# Altium PCB 万年历PCB.PcbDoc
Units mm, origin at the board's own origin, x right, y up, seen from the top; angles counter-clockwise.
Board outline 100 x 100 mm, 2 copper layers (Top Layer, Bottom Layer); 56 components, 53 nets, 233 pads, 1 vias.
Unrouted connection lines stored in the file: 119.
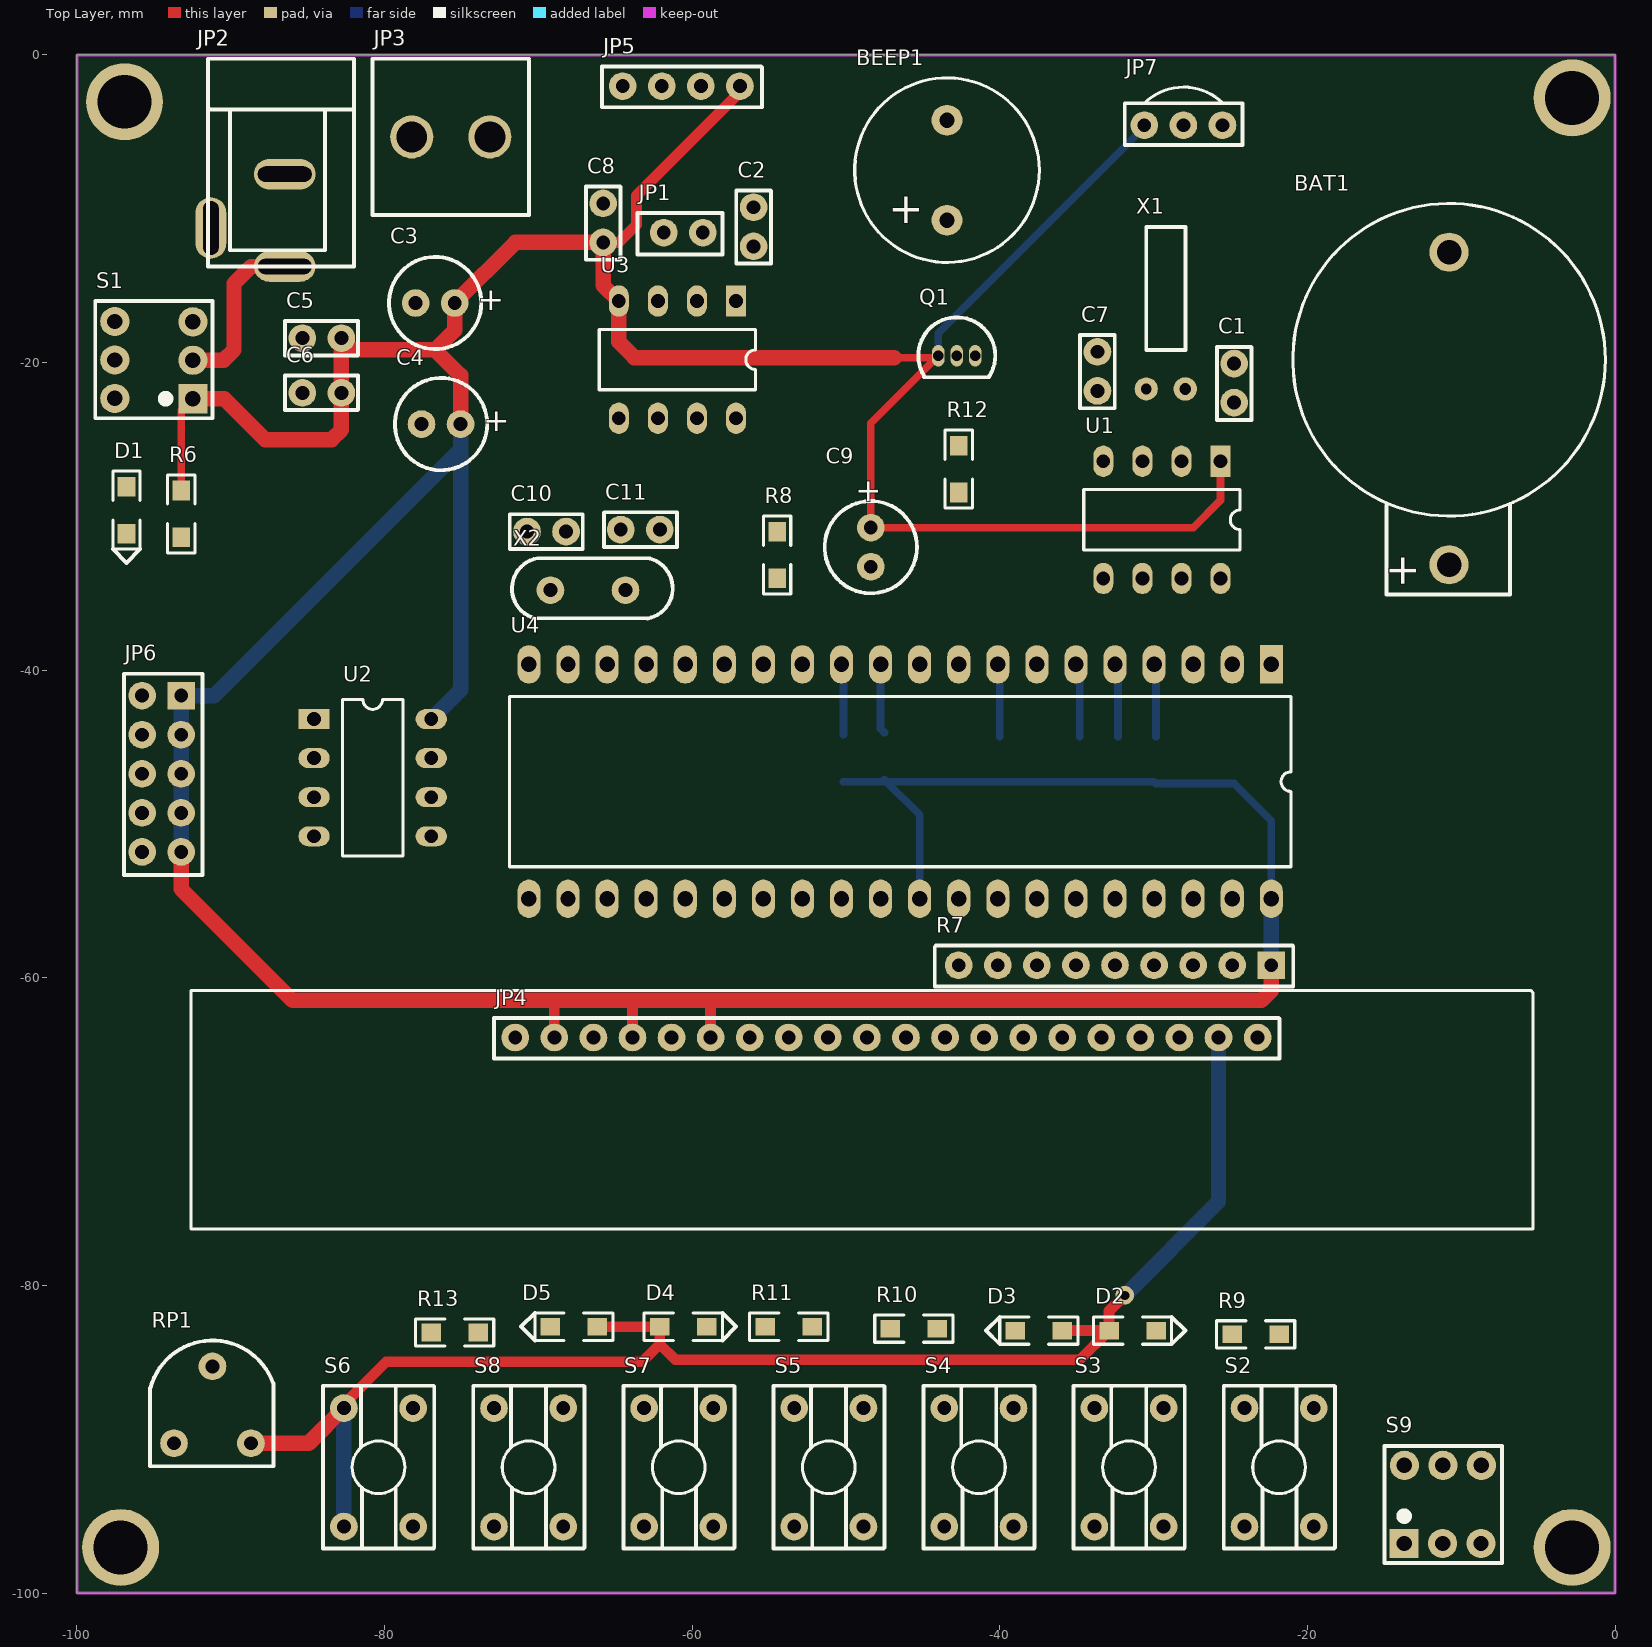
[diagram p0: Top Layer view]
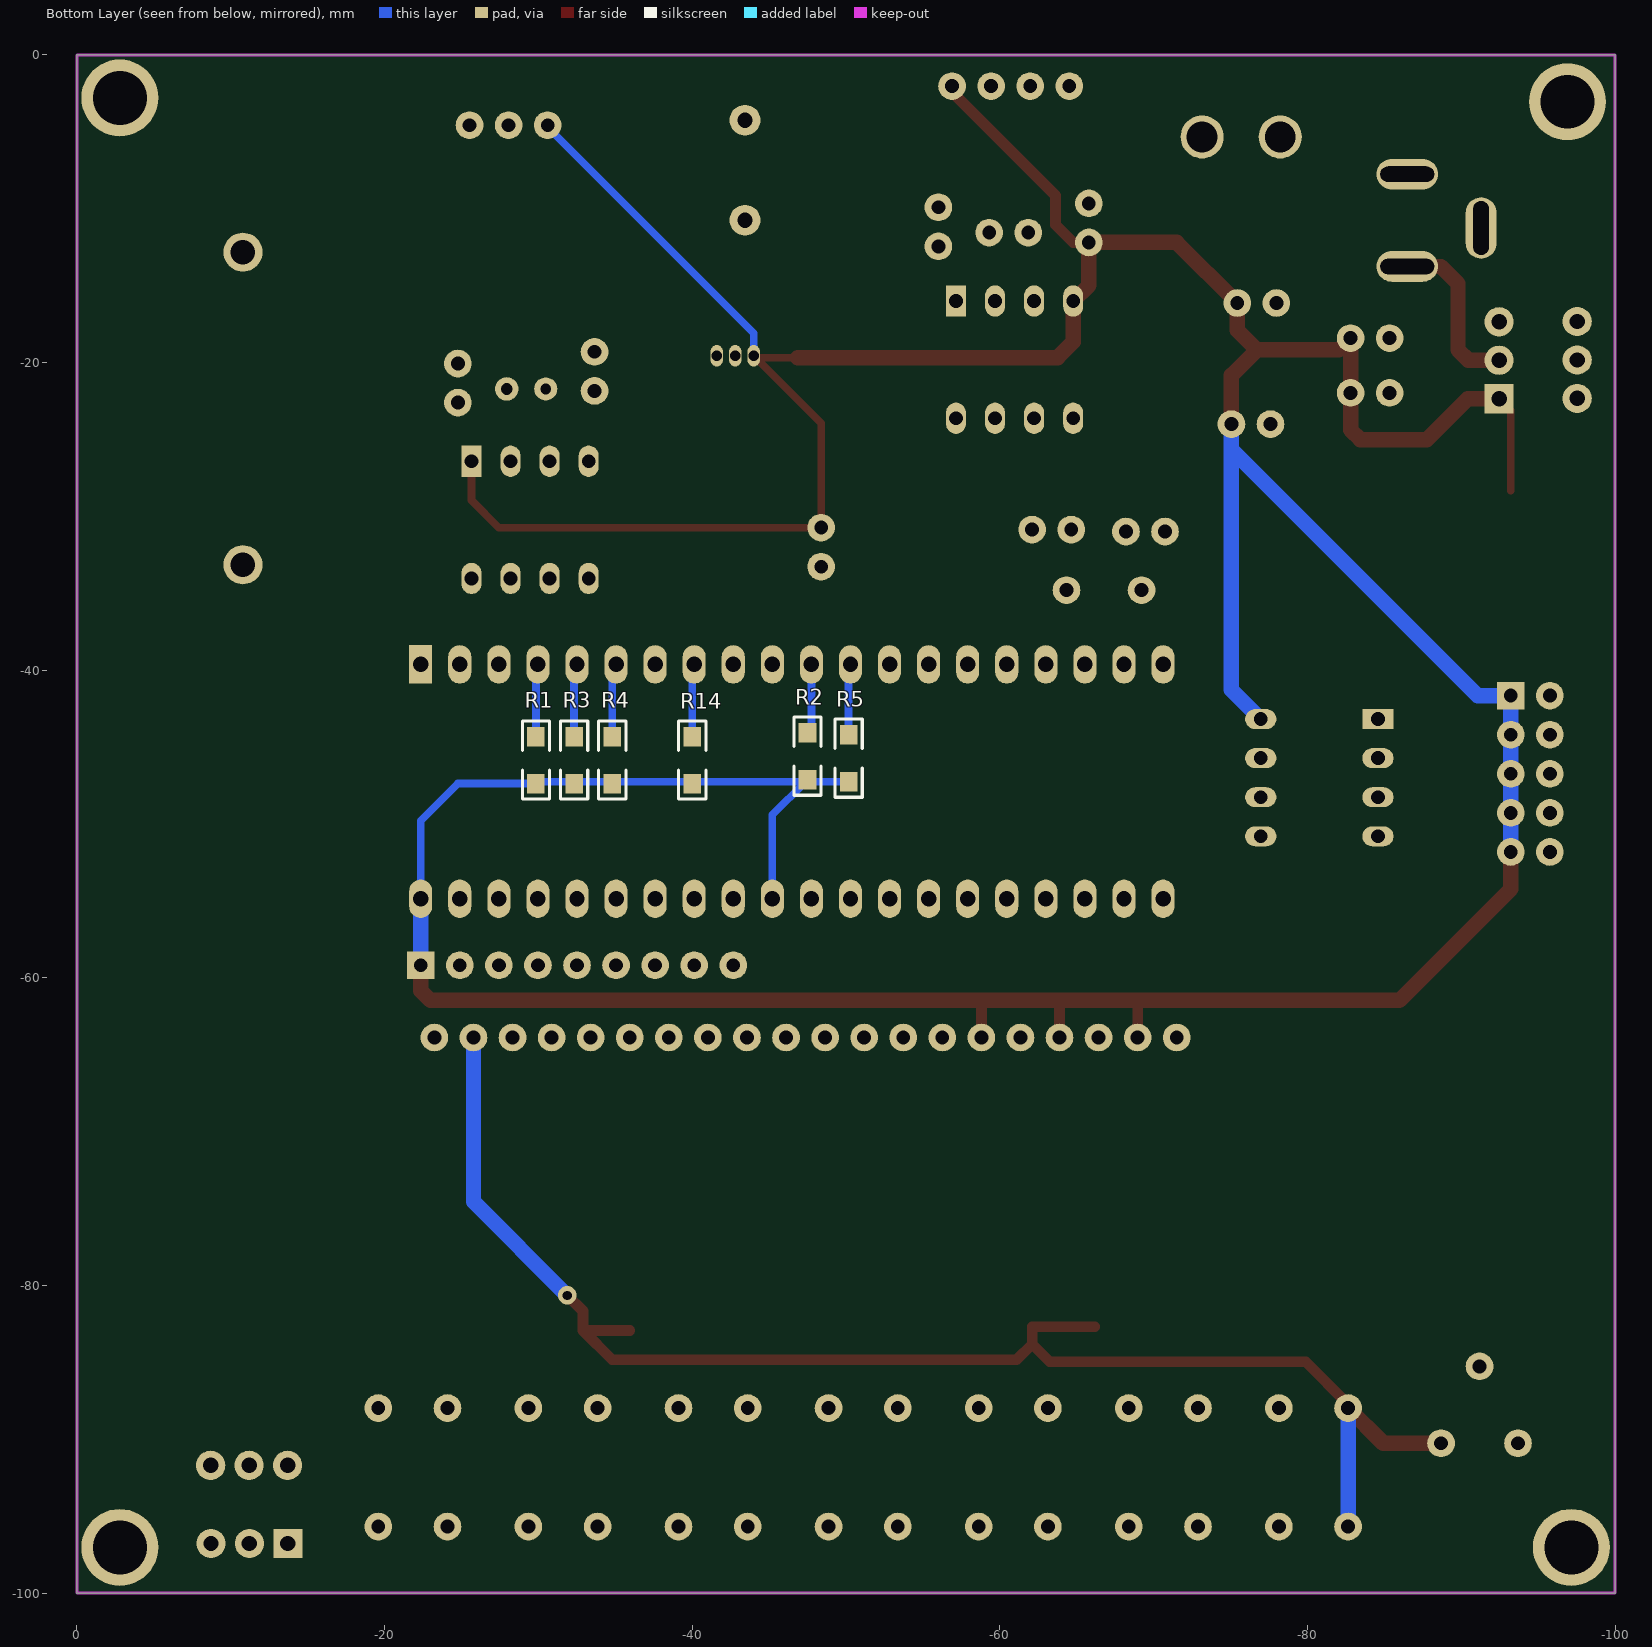
[diagram p1: Bottom Layer view, seen from below]

## Layer stack, top to bottom
Top Solder: solder mask 0.0102, Solder Resist, Dk 3.5
Top Layer: signal copper 0.0356
Dielectric 1: dielectric 0.32, FR-4, Dk 4.8
Bottom Layer: signal copper 0.0356
Bottom Solder: solder mask 0.0102, Solder Resist, Dk 3.5

## Board outline
-100,-100 0,-100 0,0 -100,0

## Design rules (kind name [scope] priority, off if disabled: settings)
Clearance [All] p1: gap=0.254
PolygonConnect [All] p1: connectstyle=Relief reliefconductorwidth=0.254 reliefentries=4 polygonreliefangle="90 Angle" airgapwidth=0.254
RoutingCorners [All] p1: cornerstyle=Round minsetback=2.54 maxsetback=2.54
RoutingVias [All] p1: holewidth=0.711 width=1.27 viastyle="Through Hole" minholewidth=0.711 minwidth=1.27 maxholewidth=0.711 maxwidth=1.27
SolderMaskExpansion [All] p1: expansion=0.102
Width Width_gnd [InNet('GND')] p1: maxlimit=0.254 minlimit=0.254 preferedwidth=0.254
Width Width_A [InNet('A')] p2: maxlimit=1 minlimit=1 preferedwidth=1
Width Width_3v [InNet('+3V')] p3: maxlimit=0.7 minlimit=0.7 preferedwidth=0.7
Width Width_vcc [InNet('+5')] p4: maxlimit=1 minlimit=0.5 preferedwidth=1
Width [All] p5: maxlimit=0.5 minlimit=0.5 preferedwidth=0.5
29 further rules are at their usual default settings.

## Components (designator, comment, footprint, x,y, rotation, side; value= is the part's Value field where it differs from the comment)
BAT1 "3V" CR3202 -10.795,-19.812 r270 top
BEEP1 "BEEP" BEEP -43.434,-7.493 r180 top
C1 "CAP" cap-cp -24.765,-22.606 r90 top
C2 "CAP" cap-cp -56.007,-12.446 r90 top
C3 "10UF" CAP-DJ -76.708,-16.129 r180 top
C4 "10UF" CAP-DJ -76.327,-24.003 r180 top
C5 "CAP" cap-cp -85.344,-18.415 r0 top
C6 "CAP" cap-cp -85.344,-21.971 r0 top
C7 "CAP" cap-cp -33.655,-21.844 r90 top
C8 "CAP" cap-cp -65.786,-12.192 r90 top
C9 "10UF" CAP-DJ -48.387,-32.004 r270 top
C10 "CAP" cap-cp -70.739,-30.988 r0 top
C11 "CAP" cap-cp -62.103,-30.861 r180 top
D1 "LED" 0805-led -96.774,-29.591 r270 top
D2 "LED" 0805-led -31.369,-82.931 r0 top
D3 "LED" 0805-led -37.465,-82.931 r180 top
D4 "LED" 0805-led -60.579,-82.677 r0 top
D5 "LED" 0805-led -67.691,-82.677 r180 top
JP1 "1x2" PZ-2 -61.849,-11.557 r180 top
JP2 "1x2" dc-0005 -86.487,-0.254 r270 top
JP3 "1x2" 5.08DZ -78.232,-5.334 r0 top
JP4 "1x20" PZ-20 -23.241,-63.881 r180 top
JP5 "1x4" PZ-4 -56.896,-2.032 r180 top
JP6 "2x5" PZ-2x5 -93.218,-41.656 r270 top
JP7 "1x3" PZ-3 -30.607,-4.572 r0 top
Q1 "9012" 9012-TO-92 -42.799,-19.558 r0 top
R1 "10K" 0805-res -29.845,-45.847 r90 bottom
R2 "10K" 0805-res -47.498,-45.593 r90 bottom
R3 "10K" 0805-res -32.322,-45.847 r90 bottom
R4 "10K" 0805-res -34.798,-45.847 r90 bottom
R5 "10K" 0805-res -50.165,-45.72 r90 bottom
R6 "10K" 0805-res -93.218,-29.845 r90 top
R7 "1x9" PZ-9 -22.352,-59.182 r180 top
R8 "10K" 0805-res -54.483,-32.512 r90 top
R9 "10K" 0805-res -23.368,-83.185 r180 top
R10 "10K" 0805-res -45.593,-82.804 r0 top
R11 "10K" 0805-res -53.721,-82.677 r180 top
R12 "10K" 0805-res -42.672,-26.924 r270 top
R13 "10K" 0805-res -75.438,-83.058 r0 top
R14 "10K" 0805-res -40.005,-45.847 r270 bottom
RP1 "103" VR -91.186,-87.757 r0 top
S1 "按键" key-6 -92.456,-22.352 r90 top
S2 "按键" KEY-4 -21.844,-91.821 r90 top
S3 "按键" KEY-4 -31.602,-91.821 r90 top
S4 "按键" KEY-4 -41.36,-91.821 r90 top
S5 "按键" KEY-4 -51.118,-91.821 r90 top
S6 "按键" KEY-4 -80.391,-91.821 r90 top
S7 "按键" KEY-4 -60.875,-91.821 r90 top
S8 "按键" KEY-4 -70.633,-91.821 r90 top
S9 "按键" key-6 -13.716,-96.774 r0 top
U1 "DS1302" DIP8 -25.654,-26.416 r270 top
U2 "24C04" DIP8 -84.582,-43.18 r0 top
U3 "语音芯片" DIP8 -57.15,-16.002 r270 top
U4 "ST89C52" DIP40 -22.352,-39.624 r270 top
X1 "32.768KHz" 32.768khz -30.48,-21.717 r0 top
X2 "12MHz" 12mhz -69.215,-34.798 r0 top

## Footprints (in the part's own frame and the unit in brackets; to place one, negate y for a bottom-side part, rotate by r counter-clockwise, add the part's x,y. Pads: shape width x height; smd on the part's side, far side on the other; paste and mask are expansions set on the pad)
5.08DZ [mm]
  round 2.8 hole 2: 1(0,0) 2(5.08,0)
  silkscreen extent -2.54,-5.08 7.62,5.08
12mhz [mm]
  round 1.8 hole 0.9: 1(0,0) 2(4.88,0)
  silkscreen extent -2.5,-1.84 7.95,2.07
32.768khz [mm]
  round 1.5 hole 0.7: 1(0,0)
  round 1.524 hole 0.762: 2(2.54,0)
  silkscreen extent 0,2.54 2.54,10.54
0805-led [mm]
  rect 1.27x1.14 smd: 1(-1.525,0) 2(1.525,0)
  silkscreen extent -2.54,-0.89 3.43,0.89
0805-res [mm]
  rect 1.27x1.14 smd: 1(-1.525,0) 2(1.525,0)
  silkscreen extent -2.54,-0.89 2.54,0.89
9012-TO-92 [mm]
  oval 0.8x1.4 hole 0.7: 1(-1.2,0) 2(0,0) 3(1.2,0)
  silkscreen extent -2.5,-1.4 2.5,2.5
BEEP [mm]
  round 2 hole 1: 1(0,3.25) 2(0,-3.25)
  silkscreen extent -6,-6 6,6
cap-cp [mm]
  round 1.8 hole 0.9: 1(0,0) 2(2.54,0)
  silkscreen extent -1.12,-1.12 3.62,1.12
CAP-DJ [mm]
  round 1.8 hole 0.9: 1(-1.27,0) 2(1.27,0)
  silkscreen extent -3,-3 3,3
CR3202 [mm]
  round 2.54 hole 1.6: 1(13.335,0) 2(-6.985,0)
  silkscreen extent -10.15,-10.16 15.27,10.16
dc-0005 [mm]
  oval 2x4 hole 1 slot 3.5 at 90 deg: 1(13.5,0) 2(7.5,0)
  oval 4x2 hole 1 slot 3.5 at 0 deg: 3(11,-4.8)
  silkscreen extent 0,-4.98 13.5,4.5
DIP8 [mm]
  rect 2.032x1.3 hole 0.9: 1(0,0)
  oval 2.032x1.3 hole 0.9: 2(0,-2.54) 3(0,-5.08) 4(0,-7.62) 5(7.62,-7.62) 6(7.62,-5.08) 7(7.62,-2.54) 8(7.62,0)
  silkscreen extent 1.85,-8.89 5.77,1.27
DIP40 [mm]
  rect 2.5x1.5 hole 1: 1(0,0)
  oval 2.5x1.5 hole 1: 2(0,-2.54) 3(0,-5.08) 4(0,-7.62) 5(0,-10.16) 6(0,-12.7) 7(0,-15.24) 8(0,-17.78) 9(0,-20.32) 10(0,-22.86) 11(0,-25.4) 12(0,-27.94) 13(0,-30.48) 14(0,-33.02) 15(0,-35.56) 16(0,-38.1) 17(0,-40.64) 18(0,-43.18) 19(0,-45.72) 20(0,-48.26) 21(15.24,-48.26) 22(15.24,-45.72) 23(15.24,-43.18) 24(15.24,-40.64) 25(15.24,-38.1) 26(15.24,-35.56) 27(15.24,-33.02) 28(15.24,-30.48) 29(15.24,-27.94) 30(15.24,-25.4) 31(15.24,-22.86) 32(15.24,-20.32) 33(15.24,-17.78) 34(15.24,-15.24) 35(15.24,-12.7) 36(15.24,-10.16) 37(15.24,-7.62) 38(15.24,-5.08) 39(15.24,-2.54) 40(15.24,0)
  silkscreen extent 2.08,-49.53 13.16,1.27
KEY-4 [mm]
  round 1.8 hole 0.9: 1(-3.85,-2.25) 1(3.85,-2.25) 2(-3.85,2.25) 2(3.85,2.25)
  silkscreen extent -5.28,-3.63 5.3,3.6
key-6 [mm]
  rect 1.9x1.9 hole 1: 1(0,0)
  round 1.9 hole 1: 2(2.5,0) 3(5,0) 4(5.02,5.08) 5(2.52,5.08) 6(0.02,5.08)
  silkscreen extent -1.27,-1.27 6.35,6.35
PZ-2 [mm]
  round 1.8 hole 0.9: 1(-2.54,0) 2(0,0)
  silkscreen extent -3.82,-1.28 1.7,1.43
PZ-2x5 [mm]
  rect 1.8x1.8 hole 0.9: 1(0,0)
  round 1.8 hole 0.9: 2(0,-2.54) 3(2.54,0) 4(2.54,-2.54) 5(5.08,0) 6(5.08,-2.54) 7(7.62,0) 8(7.62,-2.54) 9(10.16,0) 10(10.16,-2.54)
  silkscreen extent -1.43,-3.72 11.65,1.38
PZ-3 [mm]
  round 1.8 hole 0.9: 1(0,0) 2(2.54,0) 3(5.08,0)
  silkscreen extent -1.28,-1.28 6.37,2.48
PZ-4 [mm]
  round 1.8 hole 0.9: 1(0,0) 2(2.54,0) 3(5.08,0) 4(7.62,0)
  silkscreen extent -1.43,-1.28 8.98,1.38
PZ-9 [mm]
  rect 1.8x1.8 hole 0.9: 1(0,0)
  round 1.8 hole 0.9: 2(2.54,0) 3(5.08,0) 4(7.62,0) 5(10.16,0) 6(12.7,0) 7(15.24,0) 8(17.78,0) 9(20.32,0)
  silkscreen extent -1.43,-1.28 21.88,1.38
PZ-20 [mm]
  round 1.8 hole 0.9: 1(0,0) 2(2.54,0) 3(5.08,0) 4(7.62,0) 5(10.16,0) 6(12.7,0) 7(15.24,0) 8(17.78,0) 9(20.32,0) 10(22.86,0) 11(25.4,0) 12(27.94,0) 13(30.48,0) 14(33.02,0) 15(35.56,0) 16(38.1,0) 17(40.64,0) 18(43.18,0) 19(45.72,0) 20(48.26,0)
  silkscreen extent -1.43,-1.28 49.64,1.38
VR [mm]
  round 1.8 hole 0.9: 1(-2.5,-2.5) 2(0,2.5) 3(2.5,-2.5)
  silkscreen extent -4.05,-4 3.98,4.18

## Part data
BAT1: library part 电池
BEEP1: library part 蜂鸣器
C1 C2 C5 C6 C7 C8 C10 C11: library part 瓷片电容
C3 C4 C9: library part 电解电容
Q1: library part PNP
R1 R2 R3 R4 R5 R6 R8 R9 R10 R11 R12 R13 R14: library part 电阻
RP1: library part 可调电阻
U4: library part STC89C52
X1 X2: library part 晶振

## Free pads (board coordinates)
  round 5 hole 3.5: 0(-97.155,-97.028) 0(-96.901,-3.048) 0(-2.794,-97.028) 0(-2.794,-2.794)

## Via types
v1: diameter 1.2, hole 0.6, Top Layer to Bottom Layer, 1 vias

## Nets (pads, with @x,y where several pads share a name; then routed paths per layer and width w, separated by ;. In a path a pad name is that pad's centre, name@x,y a point inside that pad or via, vN(x,y) a via of type N, cw(c..) or ccw(c..) an arc to the next point about the centre after c; other vN are vias at no path point)
+3V: BAT1.1 U1.8
+5: C3.1 C4.1 C5.2 C6.2 C8.1 C9.1 D2.1 D3.1 D4.1 D5.1 JP4.2 JP4.15 JP4.17 JP4.19 JP5.1 JP6.1 JP6.3 JP6.5 JP6.7 JP6.9 JP7.1 Q1.1 R1.1 R2.1 R3.1 R4.1 R5.1 R6.2 R7.1 R14.2 RP1.3 S1.1 S6.2 U1.1 U2.8 U3.4 U4.31 U4.40 | length 437.3
  Top Layer w0.5: R6.2 -93.218,-23.114 S1.1 ; -63.881,-61.849 -63.5,-61.468 ; -58.801,-61.722 -58.547,-61.468 ; -46.863,-19.685 Q1.1@-44.126,-19.685 ; Q1.1 Q1.1@-44.126,-19.685 ; U1.1 -25.654,-28.956 -27.432,-30.734 C9.1 -48.387,-23.946 Q1.1@-44.126,-19.685
  Top Layer w0.7: S6.2@-82.641,-87.971 -82.641,-87.721 -79.883,-84.963 -63.248,-84.963 -62.104,-83.819 ; JP4.19 -68.961,-61.468 ; D5.1 D4.1 -62.104,-83.819 ; C8.1 -64.77,-12.192 -63.627,-11.049 -63.627,-9.144 -56.896,-2.413 JP5.1 ; JP4.17 -63.881,-61.849 ; JP4.15 -58.801,-61.722 ; D3.1 D2.1 ; v1(-31.877,-80.645) -32.894,-81.662 D2.1 ; -62.104,-83.819 -61.087,-84.836 -34.799,-84.836 D2.1
  Top Layer w1: JP6.9 -93.218,-54.229 -85.979,-61.468 -68.961,-61.468 -63.5,-61.468 -58.547,-61.468 -22.987,-61.468 -22.352,-60.833 R7.1 ; S1.1 -90.424,-22.352 -87.757,-25.019 -83.439,-25.019 -82.804,-24.384 C6.2 C5.2 -82.042,-19.177 -76.708,-19.177 ; RP1.3 -84.927,-90.257 S6.2@-82.641,-87.971 ; C4.1 -75.057,-20.828 -76.708,-19.177 ; -46.863,-19.685 -63.754,-19.685 -64.77,-18.669 U3.4 -65.786,-14.986 C8.1 -71.501,-12.192 C3.1 -75.438,-17.907 -76.708,-19.177
  Bottom Layer w0.5: R5.1 R2.1@-47.371,-47.245 ; R2.1 R2.1@-47.371,-47.245 ; U4.31 -45.212,-49.404 R2.1@-47.371,-47.245 ; Q1.1 -43.999,-18.091 -30.607,-4.699 JP7.1 ; U4.40 -22.352,-49.784 -24.764,-47.372 R1.1 -29.972,-47.245 R2.1@-47.371,-47.245
  Bottom Layer w1: JP6.9 JP6.7 JP6.5 JP6.3 JP6.1 -91.059,-41.656 -75.057,-25.654 ; S6.2@-82.641,-95.671 S6.2@-82.641,-87.971 ; U2.8 -75.057,-41.275 -75.057,-25.654 ; C4.1 -75.057,-25.654 ; v1(-31.877,-80.645) -25.781,-74.549 JP4.2 ; R7.1 U4.40
A: JP2.1 JP3.1 S1.2 | length 11
  Top Layer w1: S1.2 -90.464,-19.852 -89.789,-19.177 -89.789,-14.859 -88.684,-13.754 JP2.1
GND: BAT1.2 BEEP1.2 C1.1 C2.2 C3.2 C4.2 C5.1 C6.1 C7.1 C8.2 C10.1 C11.1 D1.2 JP2.2 JP3.2 JP4.1 JP5.4 JP6.2 JP6.4 JP6.6 JP6.8 JP6.10 JP7.3 R8.2 RP1.1 S2.2 S3.2 S4.2 S5.2 S7.2 S8.2 S9.1 U1.4 U2.1 U2.2 U2.3 U2.4 U2.7 U3.5 U4.20
NetBEEP1_1: BEEP1.1 Q1.3
NetC1_2: C1.2 U1.2 X1.2
NetC2_1: C2.1 U3.1
NetC7_2: C7.2 U1.3 X1.1
NetD1_1: D1.1 R6.1
NetD2_2: D2.2 R9.2
NetD3_2: D3.2 R10.2
NetD4_2: D4.2 R11.2
NetD5_2: D5.2 R13.2
NetJP1_1: JP1.1 U3.2
NetJP1_2: JP1.2 U3.3
NetJP4_3: JP4.3 RP1.2
NetJP4_20: JP4.20 S9.2
NetQ1_2: Q1.2 R12.1
P0.0: JP4.7 R7.2 U4.39
P0.1: JP4.8 R7.3 U4.38
P0.2: JP4.9 R7.4 U4.37
P0.3: JP4.10 R7.5 U4.36
P0.4: JP4.11 R7.6 U4.35
P0.5: JP4.12 R7.7 U4.34
P0.6: JP4.13 R7.8 U4.33
P0.7: JP4.14 R7.9 U4.32
P1.0: JP4.4 U4.1
P1.1: JP4.5 U4.2
P1.2: JP4.6 U4.3
P1.3: R1.2 U1.7 U4.4 | length 4.8
  Bottom Layer w0.5: U4.4 -29.845,-39.751 R1.2
P1.4: R3.2 U1.6 U4.5 | length 4.8
  Bottom Layer w0.5: U4.5 -32.322,-39.814 R3.2
P1.5: R4.2 U1.5 U4.6 | length 4.8
  Bottom Layer w0.5: U4.6 -34.798,-39.878 R4.2
P1.6: R12.2 U4.7
P1.7: JP7.2 R14.1 U4.8 | length 4.8
  Bottom Layer w0.5: U4.8 -40.005,-39.751 R14.1
P3.2: R5.2 U2.5 U4.12 | length 4.6
  Bottom Layer w0.5: U4.12 -50.165,-39.751 R5.2
P3.3: U3.8 U4.13
P3.4: U3.7 U4.14
P3.5: U3.6 U4.15
P3.6: R9.1 U4.16
P3.7: R10.1 U4.17
P20: R13.1 U4.21
P21: R11.1 U4.22
P22: S8.1 U4.23
P23: S7.1 U4.24
P24: S5.1 U4.25
P25: S4.1 U4.26
P26: S3.1 U4.27
P27: S2.1 U4.28
RST: C9.2 R8.1 S6.1 U4.9
RXD: JP5.3 U4.10
TXD: JP5.2 R2.2 U2.6 U4.11 | length 4.5
  Bottom Layer w0.5: U4.11 -47.752,-43.814 R2.2
XTAL1: C10.2 U4.19 X2.1
XTAL2: C11.2 U4.18 X2.2
pads on no net: JP2.3 JP4.16 JP4.18 S1.3 S1.4 S1.5 S1.6 S9.3 S9.4 S9.5 S9.6 U4.29 U4.30

## Keep-outs
Keep-Out Layer:
  the board outline again, w0.2

## Silkscreen, mask and mechanical layers (free items; w line width, h text height)
Top Overlay:
  lines w0.2: -92.583,-76.327 -92.583,-60.833 -5.461,-60.833 -5.334,-60.96 -5.334,-76.327 -92.583,-76.327

## Text inside footprints (layer, text, board x,y; h text height)
BAT1: Top Overlay "+" at -14.656,-32.385 h2 r270
BEEP1: Top Overlay "+" at -44.933,-9.22 h2 r180
C3: Top Overlay "+" at -72.233,-15.329 h1.5 r180
C4: Top Overlay "+" at -71.852,-23.203 h1.5 r180
C9: Top Overlay "+" at -49.187,-27.529 h1.5 r270